# Altium PCB PCB1.PcbDoc
Units mil, origin at the board's own origin, x right, y up, seen from the top; angles counter-clockwise.
Board outline 3543.31 x 1574.8 mil, 2 copper layers (Top Layer, Bottom Layer); 18 components, 5 nets, 56 pads, 7 vias.
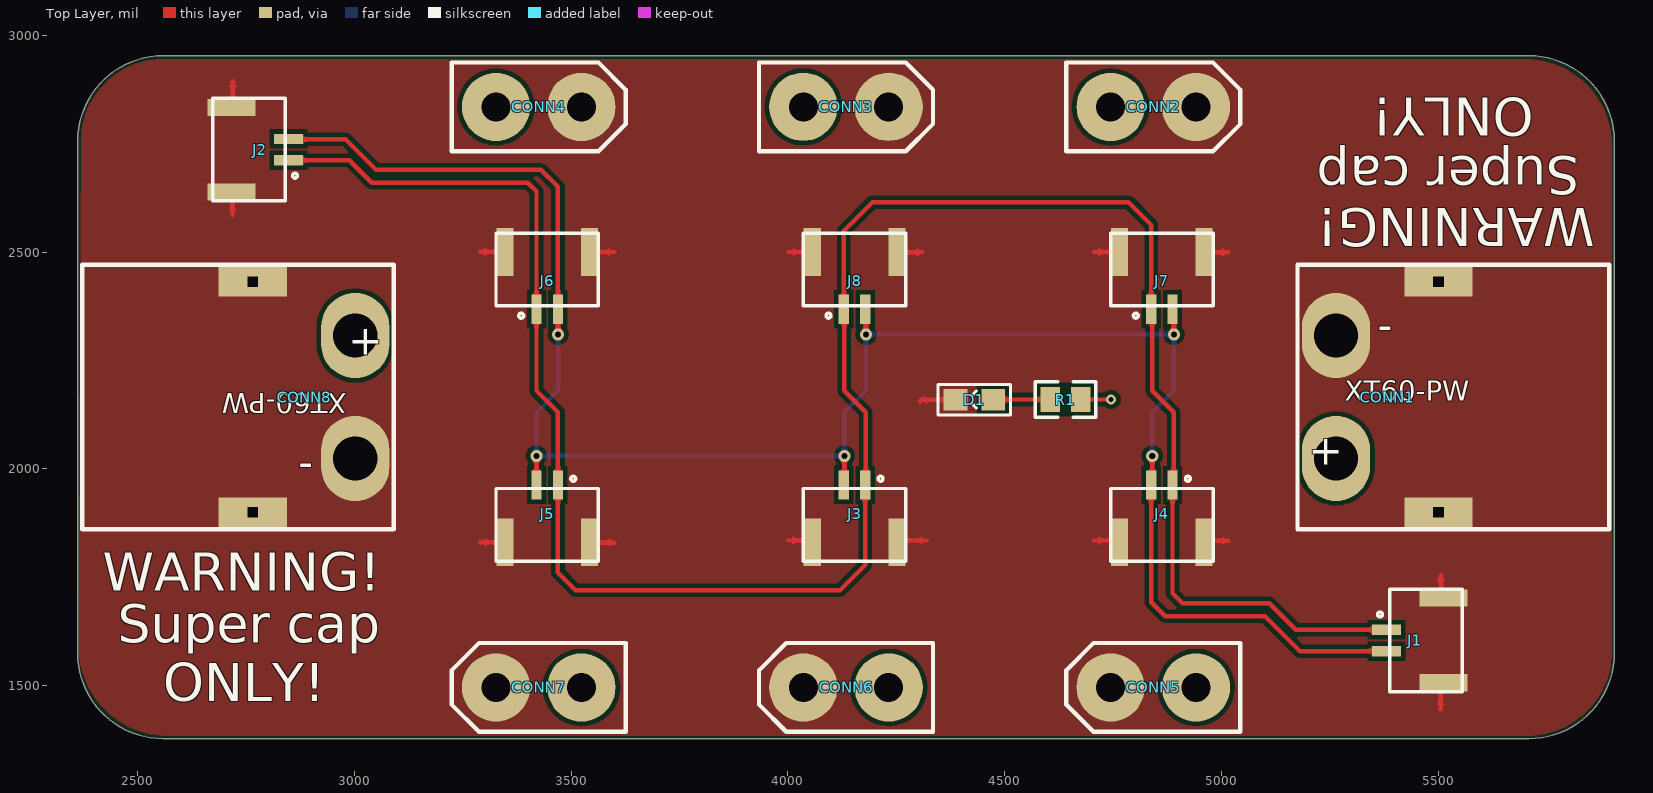
[diagram p0: Top Layer view]
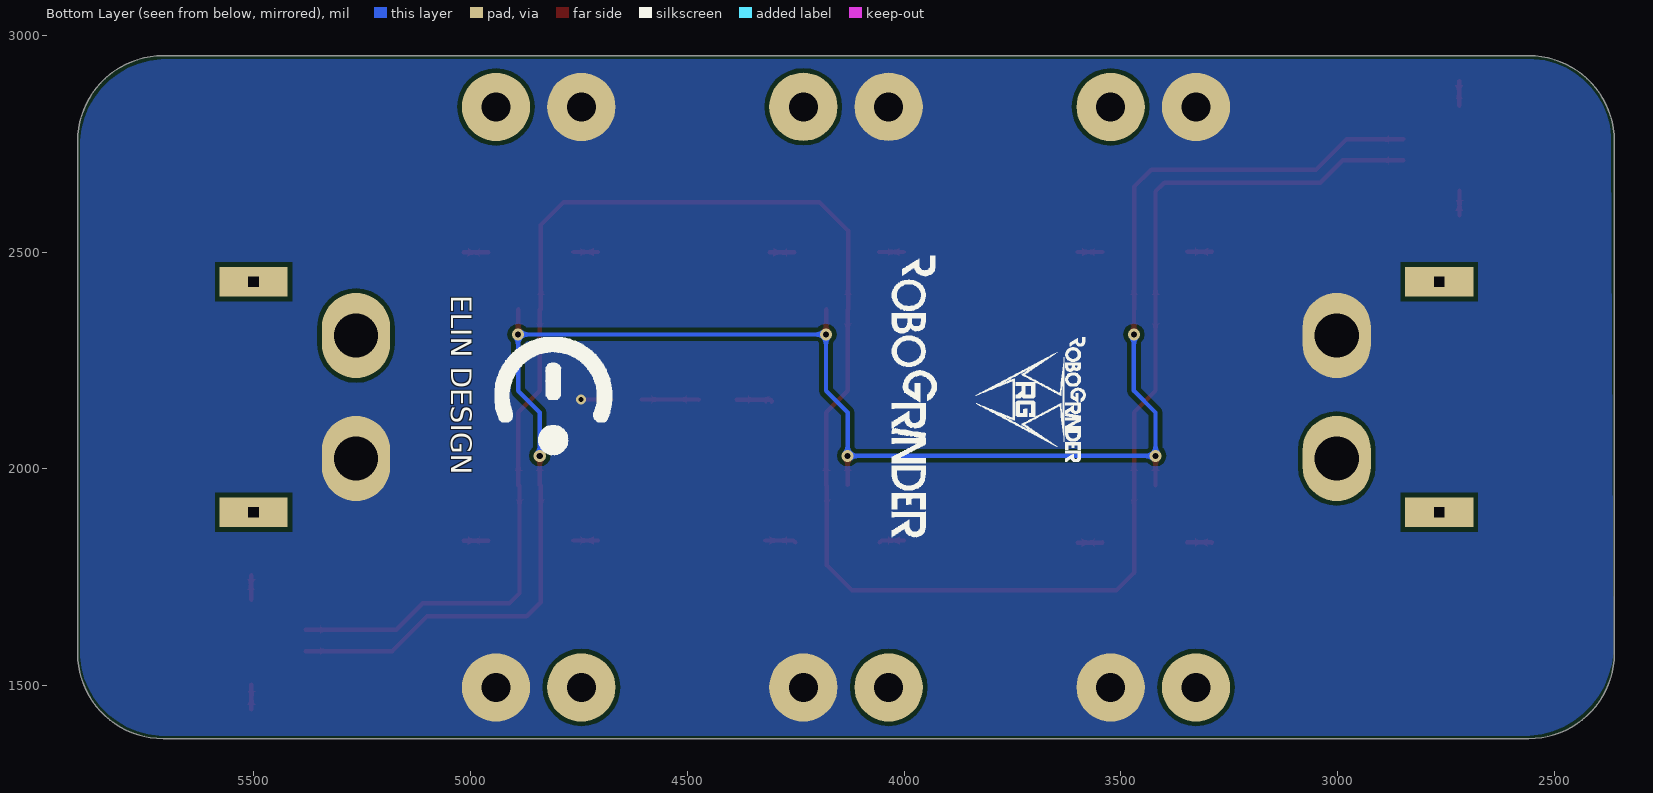
[diagram p1: Bottom Layer view, seen from below]
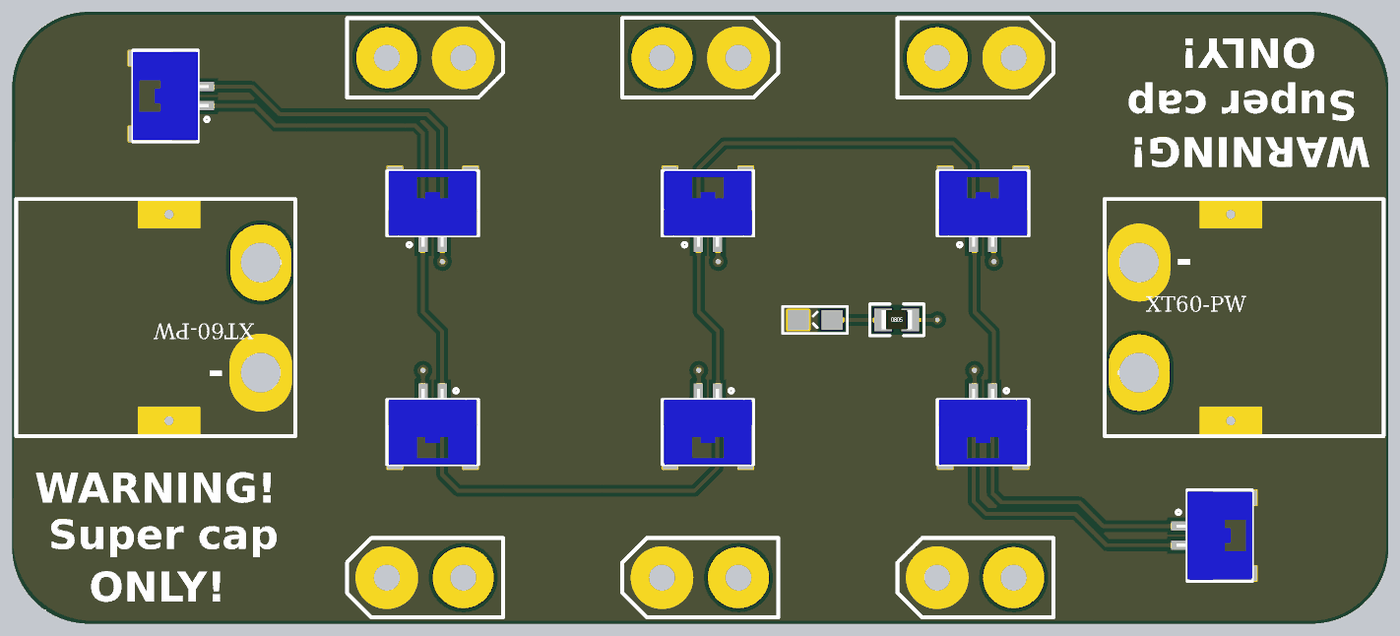
[diagram p2: 3D render of the assembled board from above, using the file's embedded part models]

## Layer stack, top to bottom
Top Solder: solder mask 0.4, Solder Resist, Dk 3.5
Top Layer: signal copper 1.4
Dielectric 1: dielectric 12.6, FR-4, Dk 4.8
Bottom Layer: signal copper 1.4
Bottom Solder: solder mask 0.4, Solder Resist, Dk 3.5

## Board outline
2362.2,1574.8 2362.2,2755.91 cw(c2559.06,2755.91) 2559.06,2952.76 5708.66,2952.76 cw(c5708.66,2755.91) 5905.51,2755.91 5905.51,1574.8 cw(c5708.66,1574.8) 5708.66,1377.95 2559.06,1377.95 cw(c2559.06,1574.8)

## Design rules (kind name [scope] priority, off if disabled: settings)
Clearance [All] p1: gap=10 ignorepadtopadclearanceinfootprint=FALSE except(0: Arc-Hole Track-Hole SMDPad-Hole THPad-Hole Via-Hole Fill-Hole Poly-Hole Region-Hole Text-Hole)
PlaneClearance [All] p1: clearance=50
PlaneConnect [All] p1: planeconnectstyle=Direct reliefexpansion=20 reliefentries=4 reliefconductorwidth=10 reliefairgap=10
PolygonConnect [All] p1: connectstyle=Direct reliefconductorwidth=10 reliefentries=4 polygonreliefangle="90 Angle" airgapwidth=10
RoutingVias [All] p1: holewidth=14 width=28 viastyle="Through Hole" minholewidth=14 minwidth=28 maxholewidth=14 maxwidth=28
SolderMaskExpansion [All] p1: expansion=4
Width [All] p1: maxlimit=10 minlimit=10 preferedwidth=10
28 further rules are at their usual default settings.

## Classes and differential pairs
component class Sheet1: CONN2 CONN3 CONN4 CONN5 CONN6 CONN7 D1 J1 J2 J3 J4 J5 J6 J7 J8 R1

## Components (designator, comment, footprint, x,y, rotation, side; value= is the part's Value field where it differs from the comment)
CONN1 "XT60PW-F" XT60PW-M 5263.78,2165.75 r0 top locked
CONN2 "XT30UPB" XT30UPB 4842.52,2834.65 r0 top
CONN3 "XT30UPB" XT30UPB 4133.86,2835 r0 top locked
CONN4 "XT30UPB" XT30UPB 3425.2,2834.65 r0 top locked
CONN5 "XT30UPB" XT30UPB 4842.52,1496.06 r180 top locked
CONN6 "XT30UPB" XT30UPB 4133.86,1496.06 r180 top locked
CONN7 "XT30UPB" XT30UPB 3425.2,1496.06 r180 top locked
CONN8 "XT60PW-F" XT60PW-M 3002.22,2165.75 r180 top locked
D1 "LED" 0805二极管 4430,2160 r180 top
J1 "GH1.25-2P" gh1.25-2p-立 5511.81,1604.33 r90 top
J2 "GH1.25-2P" gh1.25-2p-立 2716.54,2736.22 r270 top
J3 "GH1.25-2P" gh1.25-2p-立 4153.54,1830.71 r0 top
J4 "GH1.25-2P" gh1.25-2p-立 4862.2,1830.71 r0 top
J5 "GH1.25-2P" gh1.25-2p-立 3444.88,1830.71 r0 top
J6 "GH1.25-2P" gh1.25-2p-立 3444.88,2500 r180 top
J7 "GH1.25-2P" gh1.25-2p-立 4862.2,2500 r180 top
J8 "GH1.25-2P" gh1.25-2p-立 4153.54,2500 r180 top
R1 "R" 0805_R 4640,2160 r0 top

## Footprints (in the part's own frame and the unit in brackets; to place one, negate y for a bottom-side part, rotate by r counter-clockwise, add the part's x,y. Pads: shape width x height; smd on the part's side, far side on the other; paste and mask are expansions set on the pad)
0805_R [mm]
  rect 1.16x1.47 smd: 1(-0.89,0) 2(0.89,0)
  silkscreen extent -1.77,-1.04 1.77,1.03, body extent -1,-0.62 1,0.63, height 0.49
0805二极管 [mm]
  rect 1.4x1.27 smd: 1(-1.103,0.012) 2(1.107,0.012)
  silkscreen extent -2.1,-0.88 2.13,0.9
gh1.25-2p-立 [mm]
  rect 0.6x1.7 smd mask+0.05: 1(0.625,3.35) 2(-0.625,3.35)
  rect 1x2.8 smd mask+0.05: P(-2.475,0) P(2.475,0)
  silkscreen extent -3,-1.1 3,3.87, body extent -2.87,-1.1 2.87,3.85, height 4.2
XT30UPB [mm]
  round 4 hole 1.7 mask+0.05: N(2.5,0) P(-2.5,0)
  silkscreen extent -5.1,-2.6 5.1,2.6
XT60PW-M [mm]
  rect 4x1.75 hole 0.6 square mask+0.05: 3(6,-6.75) 3(6,6.75)
  oval 4x5 hole 2.6 mask+0.05: N(0,3.6) P(0,-3.6)
  silkscreen extent -2.25,-7.75 16,7.75

## Part data
CONN1 CONN8: "卧式焊板XT60（母）"
CONN2 CONN3 CONN4 CONN5 CONN6 CONN7: "立式焊板XT30（通用）"
J1 J2 J3 J4 J5 J6 J7 J8: Package=None, Availability=Good, MF=Molex, MP=53261-0271, Price="0.42 USD", SnapEDA_Link=https://www.snapeda.com/parts/53261-0271/Molex/view-part/?ref=snap

## Via types
v1: diameter 28, hole 14, Top Layer to Bottom Layer, tented both sides, 6 vias
v2: diameter 24, hole 12, Top Layer to Bottom Layer, tented both sides, 1 vias

## Nets (pads, with @x,y where several pads share a name; then routed paths per layer and width w, separated by ;. In a path a pad name is that pad's centre, name@x,y a point inside that pad or via, vN(x,y) a via of type N, cw(c..) or ccw(c..) an arc to the next point about the centre after c; other vN are vias at no path point)
GND: CONN1.3 CONN1.N CONN2.N CONN3.N CONN4.N CONN5.N CONN6.N CONN7.N CONN8.3 CONN8.N D1.2 J1.P J2.P J3.P J4.P J5.P J6.P J7.P J8.P | length 1010.8
  Top Layer w10: 2719.29,2585 J2.P@2719.29,2641.73 ; J2.P@2720,2837.32 2720,2894.29 ; 3290,1830 cw(c3290.71,1830) 3290.71,1830.71 J5.P@3347.44,1830.71 ; 3290,2500.71 J6.P@3346.73,2500.71 ; J5.P@3542.32,1830.71 ccw(c3543.03,1830.71) 3543.03,1830 3600,1830 ; J6.P@3542.32,2500 3599.29,2500 ; 4000,1835 4051.81,1835 J3.P@4056.1,1830.71 ; 4000.71,2500 J8.P@4057.68,2500 ; J3.P@4250.98,1830.71 4255.28,1835 4320,1835 ; J8.P@4253.27,2499.29 4310,2499.29 ; 4305,2155 cw(c4309.52,2155) 4309.52,2159.52 D1.2 ; 4705.71,1835 J4.P@4762.68,1835 ; 4705.71,2500 J7.P@4762.68,2500 ; J4.P@4958.27,1834.29 5015,1834.29 ; J7.P@4958.27,2499.29 5015,2499.29 ; 5505,1445.71 J1.P@5505,1502.68 ; J1.P@5505.71,1698.27 5505.71,1755
NET1: J1.1 J2.1 J3.1 J4.1 J5.1 J6.1 J7.1 J8.1 | length 5197
  Top Layer w10: J2.1 2988.39,2711.61 3040,2660 3400,2660 3420,2640 3420,2180 3469.49,2130.51 J5.1 3469.49,1760.51 3510,1720 4120,1720 4178.15,1778.15 J3.1 ; J8.1 4128.94,2548.94 4195,2615 4785,2615 4837.6,2562.4 J7.1 ; J8.1@4130,2367.83 4130,2180 4179.49,2130.51 J3.1@4179.49,1962.6 ; J7.1@4840,2367.83 4840,2180 4889.49,2130.51 J4.1@4889.49,1962.6 ; J4.1 4886.81,1713.19 4910,1690 5110,1690 5171.06,1628.94 J1.1
NET2: J1.2 J2.2 J3.2 J4.2 J5.2 J6.2 J7.2 J8.2 | length 4505.8
  Top Layer w10: J2.2 2849.25,2760 2980,2760 3050,2690 3430,2690 3469.49,2650.51 J6.2 3469.74,2367.85 3469.74,2310.26 v1(3470,2310) ; v1(3420,2030) 3420.14,2029.86 3420.14,1962.74 J5.2 ; J3.2@4130.14,1962.74 v1@4130.14,2029.86 ; v1@4179.74,2310.26 J8.2@4179.74,2367.85 ; J4.2 4837.6,1692.4 4870,1660 5100,1660 5180.28,1579.72 J1.2 ; J4.2@4840.14,1962.74 v1@4840.14,2029.86 ; v1@4889.74,2310.26 J7.2@4889.74,2367.85
  Bottom Layer w10: v1(3470,2310) 3470,2180 3420,2130 v1(3420,2030) v1(4130,2030) 4130,2130 4180,2180 v1(4180,2310) v1(4890,2310) 4890,2180 4840,2130 v1(4840,2030)
NetD1_1: D1.1 R1.1 | length 132
  Top Layer w10: D1.1 4473.41,2160 R1.1
VCC: CONN1.P CONN2.P CONN3.P CONN4.P CONN5.P CONN6.P CONN7.P CONN8.P R1.2 | length 70
  Top Layer w10: R1.2 v2(4745,2160)

## Polygon pours and split planes (outlines as drawn)
GND on Top Layer "Top Layer-VCC" (solid, remove dead copper, pour order 38): 2369.92,2754.92 cw(c2560,2754.92) 2560,2945 5700,2945 cw(c5700,2745) 5900,2745 5900,1580 cw(c5705,1580) 5705,1385 2570,1385 cw(c2570,1589.92) 2365.08,1589.92
no net on Top Layer "Top Layer-No Net" (solid, pour order 26): 2360,2730
no net on Top Layer "Top Layer-No Net 1" (solid, pour order 24): 2370,2775
no net on Top Layer "Top Layer-No Net 2" (solid, pour order 20): 2365,2645
no net on Top Layer "Top Layer-No Net 3" (solid, pour order 18): 2370,2700
no net on Top Layer "Top Layer-No Net 4" (solid, pour order 16): 2470,2700
no net on Top Layer "Top Layer-No Net 5" (solid, pour order 14): 2380,2810
no net on Top Layer "Top Layer-No Net 6" (solid, pour order 12): 2410,2670
no net on Top Layer "Top Layer-No Net 7" (solid, pour order 10): 2370,2100
no net on Top Layer "Top Layer-No Net 8" (solid, pour order 8): 2370,2480
no net on Top Layer "Top Layer-No Net 9" (solid, pour order 6): 2370,2680
no net on Top Layer "Top Layer-No Net 10" (solid, pour order 4): 2370,2750
no net on Top Layer "Top Layer-No Net 11" (solid, pour order 2): 2370,2700
no net on Top Layer "Top Layer-No Net 12" (solid, pour order 0): 2370,2750
VCC on Bottom Layer "Bottom Layer-GND" (solid, remove dead copper, pour order 40): 2369.92,2754.92 cw(c2560,2754.92) 2560,2945 5700,2945 cw(c5700,2745) 5900,2745 5900,1580 cw(c5705,1580) 5705,1385 2570,1385 cw(c2570,1589.92) 2365.08,1589.92

## Silkscreen, mask and mechanical layers (free items; w line width, h text height)
Top Overlay:
  text "ONLY!" at 5720,2885 h150 r180
  text "Super cap" at 5825,2750 h150 r180
  text "WARNING!" at 5860,2630 h150 r180
  text "WARNING!" at 2420,1690 h150
  text "Super cap" at 2455,1570 h150
  text "ONLY!" at 2560,1435 h150
Bottom Overlay:
  drawing of 1807 lines, arcs and shapes, not listed
  text "ELIN DESIGN" at 5060,2400 h80 r90
Mechanical 1:
  the board outline again, w10

## Dimensions
5708.66,1377.95 to 5708.66,2952.76 on Mechanical 1
2362.2,1574.8 to 5905.51,1574.8 on Mechanical 1

## Text inside footprints (layer, text, board x,y; h text height)
CONN1: Top Overlay "XT60-PW" at 5283.46,2142.13 h78.74; Top Overlay "+" at 5200.79,1986.61 h118.11; Top Overlay "-" at 5360.24,2275.98 h118.11
CONN8: Top Overlay "XT60-PW" at 2982.54,2189.37 h78.74 r180; Top Overlay "+" at 3065.21,2344.88 h118.11 r180; Top Overlay "-" at 2905.76,2055.51 h118.11 r180